# Altium PCB GPST.PcbDoc
Units mm, origin at the board's own origin, x right, y up, seen from the top; angles counter-clockwise.
Board outline 123 x 40 mm, 2 copper layers (Top Layer, Bottom Layer), stack 1.621 mm thick; 106 components, 112 nets, 419 pads, 213 vias.
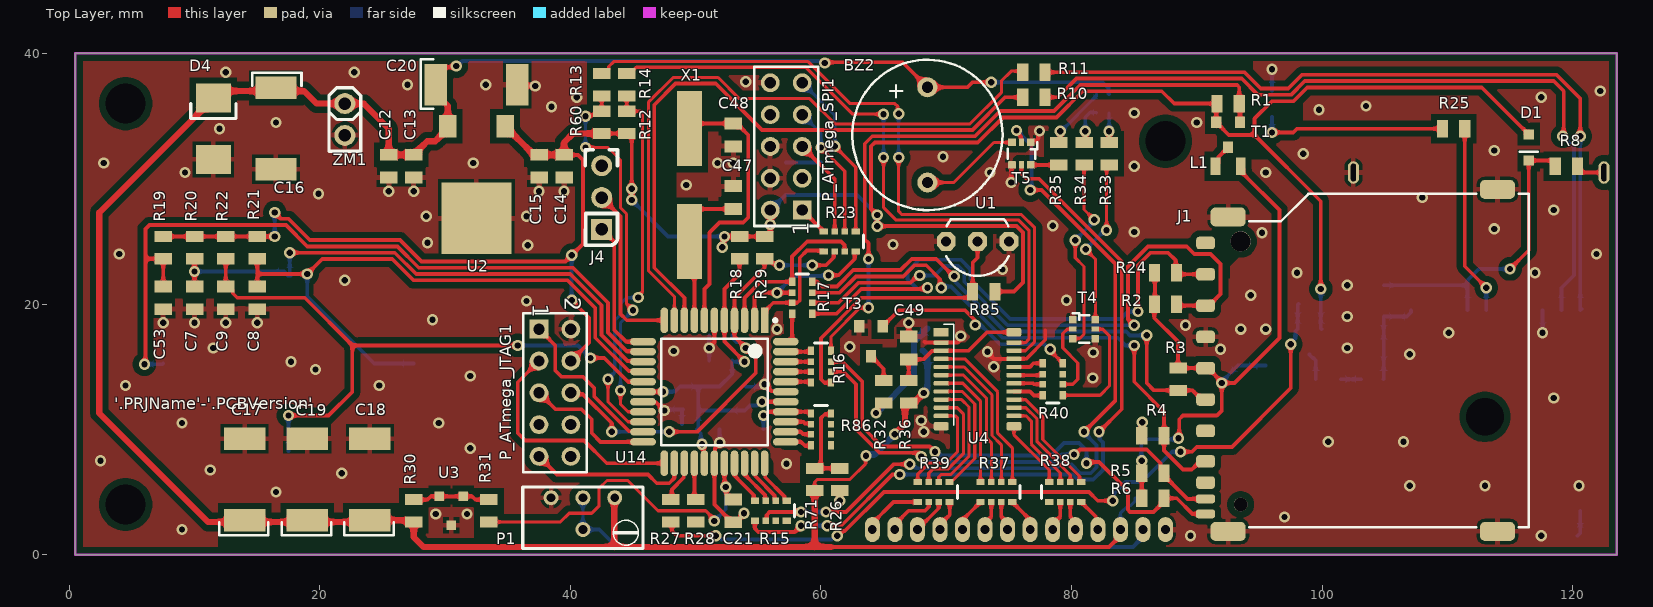
[diagram p0: Top Layer view]
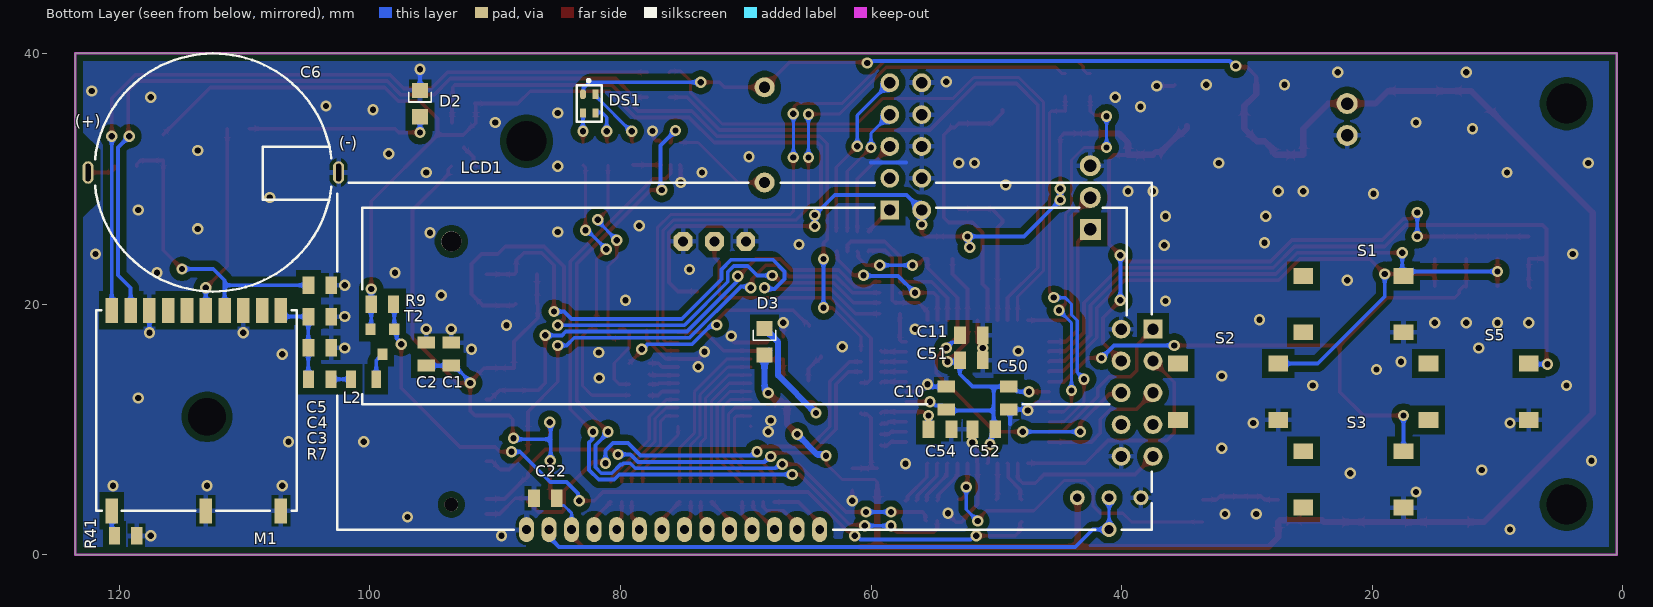
[diagram p1: Bottom Layer view, seen from below]

## Layer stack, top to bottom
Top Solder: solder mask 0.0102, Solder Resist, Dk 3.5
Top Layer: signal copper 0.0356
Dielectric1: core 1.55, FR-4, Dk 4.8
Bottom Layer: signal copper 0.0356
Bottom Solder: solder mask 0.0102, Solder Resist, Dk 3.5

## Board outline
0.5,0 0.5,40 123.5,40 123.5,0

## Design rules (kind name [scope] priority, off if disabled: settings)
AcuteAngle [All] p1 off: minimum=6.00000000000000E+0001 checktracksonly=FALSE
Clearance "Schematic Clearance Constraint" [InComponent('U14')] p1: gap=0.2 ignorepadtopadclearanceinfootprint=FALSE except(0: Arc-Hole Track-Hole SMDPad-Hole THPad-Hole Via-Hole Fill-Hole Poly-Hole Region-Hole Text-Hole)
Clearance "clearance polygon" [InPolygon] p2: gap=0.508 ignorepadtopadclearanceinfootprint=FALSE except(0: Arc-Hole Track-Hole SMDPad-Hole THPad-Hole Via-Hole Fill-Hole Poly-Hole Region-Hole Text-Hole)
Clearance [All] p3: gap=0.203 ignorepadtopadclearanceinfootprint=FALSE except(0: Arc-Hole Track-Hole SMDPad-Hole THPad-Hole Via-Hole Fill-Hole Poly-Hole Region-Hole Text-Hole)
ComponentClearance [All] p1: gap=0.001 collisioncheckmode=3 verticalgap=0.002 showdistances=TRUE
FanoutControl Fanout_Small [(CompPinCount < 5)] p4: bgadir=Out bgaviamode=Closest fanoutstyle=Rows fanoutdirection=OutOnly viagrid=0.025 // Fanout_Small (Default Rule)
FanoutControl Fanout_Default [All] p5: bgadir=Out bgaviamode=Centered fanoutstyle=Rows fanoutdirection=OutOnly viagrid=0.025 // Fanout_Default (Default Rule)
Height [All] p1 off: minheight=0 maxheight=50.4 prefheight=12.7
HoleSize [All] p1 off: absolutevalues=TRUE maxlimit=6 minlimit=0.3 maxpercent=80.000 minpercent=20.000
HoleToHoleClearance [All] p1 off: gap=0.254 allowstackedmicrovias=FALSE
LayerPairs [All] p1 off: enforce=TRUE
MinimumAnnularRing [All] p1 off: minimumring=0.2
MinimumSolderMaskSliver [All] p1 off: minsoldermaskwidth=0.152
NetAntennae [All] p1 off: netantennaetolerance=0
PasteMaskExpansion [All] p1: expansion=-0.025
PolygonConnect nothermals [isnamedpolygon('no_thermals')] p1: connectstyle=Direct reliefconductorwidth=0.254 reliefentries=4 polygonreliefangle="90 Angle" airgapwidth=0.254
PolygonConnect PolygonConnectVia [IsVia vs IsPolygon] p2: connectstyle=Direct reliefconductorwidth=0.762 reliefentries=4 polygonreliefangle="90 Angle" airgapwidth=0.254
PolygonConnect [All] p3: connectstyle=Relief reliefconductorwidth=0.406 reliefentries=4 polygonreliefangle="90 Angle" airgapwidth=0.254
RoomDefinition lcd [InComponentClass('lcd')] p1: confinementstyle=ConfineIn formatcopy=TRUE lockcomponents=FALSE outline 23.797,0.6 103.4,0.6 103.4,31.5 23.797,31.5
RoomDefinition up [InComponentClass('up')] p2: confinementstyle=ConfineIn formatcopy=TRUE lockcomponents=FALSE outline -2.3,0.4 89.2,0.4 89.2,39.2 -2.3,39.2
RoomDefinition sd [InComponentClass('sd')] p3: confinementstyle=ConfineIn formatcopy=TRUE lockcomponents=FALSE outline 86.1,0.8 118,0.8 118,30 86.1,30
RoomDefinition MAIN [InComponentClass('MAIN')] p4: confinementstyle=ConfineIn formatcopy=TRUE lockcomponents=FALSE outline 13.2,26.434 40.3,26.434 40.3,41.434 13.2,41.434
RoomDefinition gps [InComponentClass('gps')] p5: confinementstyle=ConfineIn formatcopy=TRUE lockcomponents=FALSE outline 97.7,-1.065 123.5,-1.065 123.5,25.435 97.7,25.435
RoutingVias [All] p1: holewidth=0.508 width=1.016 viastyle="Through Hole" minholewidth=0.406 minwidth=0.813 maxholewidth=0.711 maxwidth=1.27
SMDNeckDown [All] p1 off: percent=70.000
SMDToPlane [All] p1: distance=80000
SilkToSolderMaskClearance SilkscreenOverComponentPads [IsPad] p1 off: minsilkscreentomaskgap=0.152 clearancetoexposedcopper=TRUE
SolderMaskExpansion [All] p1: expansion=0.152 istentingtop=FALSE
Width Signal [All and not(InNetClass('Siec')) and not(InNetClass('HighCurrent'))] p1: maxlimit=5 minlimit=0.2 preferedwidth=0.3
Width POWER [All] p2: maxlimit=6 minlimit=0.3 preferedwidth=0.4
Width [All] p3: maxlimit=5 minlimit=0.2 preferedwidth=0.3
19 further rules are at their usual default settings.

## Classes and differential pairs
component class lcd: C22 C49 LCD1 P1 R36 R37 R38 R39 R40 U4
component class up: C7 C8 C9 C10 C11 C21 C47 C48 C50 C51 C52 C53 C54 P_ATmega_JTAG1 P_ATmega_SPI1 R12 R13 R14 R15 R16 R17 R18 R19 R20 R21 R22 R23 R26 R27 R28 R29 R30 R31 R60 R71 R85 R86 S1 S2 S3 S5 U3 U14 X1
component class sd: C1 C2 J1 L1 R1 R2 R3 R4 R5 R6 R24 T1
component class MAIN: BZ2 C12 C13 C14 C15 C16 C17 C18 C19 C20 D3 D4 DS1 J4 R32 R33 R34 R35 T3 T4 T5 U1 U2 ZM1
component class gps: C3 C4 C5 C6 D1 D2 L2 M1 R7 R8 R9 R10 R11 R25 R41 T2

## Components (designator, comment, footprint, x,y, rotation, side; value= is the part's Value field where it differs from the comment)
BZ2 "CFG06" CFG-06 68.5,33.5 r180 top
C1 "1u" C0805 93.5,16 r270 bottom
C2 "1u" C0805 95.5,16 r270 bottom
C3 "1u" C0805 104,16.5 r0 bottom
C4 "1u" C0805 104,19 r0 bottom
C5 "1u" C0805 104,21.5 r0 bottom
C6 "1F" EECRG0V105H 112.5,30.5 r0 bottom
C7 "10n" C0805 10,20.5 r270 top
C8 "10n" C0805 15,20.5 r270 top
C9 "10n" C0805 12.5,20.5 r270 top
C10 "1u" C0805 54,12.5 r270 bottom
C11 "10n" C0805 52,17.5 r0 bottom
C12 "1u" C0805 25.5,31 r90 top
C13 "1u" C0805 27.5,31 r90 top
C14 "1u" C0805 39.5,31 r90 top
C15 "1u" C0805 37.5,31 r90 top
C16 "330u" D 16.5,34 r270 top
C17 "330u" D 14,6 r90 top
C18 "330u" D 24,6 r90 top
C19 "330u" D 19,6 r90 top
C20 "330u" D 32.5,37.5 r0 top
C21 "100n" C0805 53,3.5 r90 top
C22 "1u" C0805 86,4.5 r0 bottom
C47 "10p" C0805 53,28.5 r270 top
C48 "10p" C0805 53,33.5 r90 top
C49 "1u" C0805 67,16.5 r270 top
C50 "1u" C0805 49,12.5 r90 bottom
C51 "1u" C0805 52,15.5 r0 bottom
C52 "1u" C0805 51,10 r180 bottom
C53 "10n" C0805 7.5,20.5 r270 top
C54 "100n" C0805 54.5,10 r180 bottom
D1 "RB751V-40" SOD323 116.5,32.5 r270 top
D2 "*" LED_0805 96,36 r90 bottom
D3 "*" LED_0805 68.5,17 r90 bottom
D4 "SM4007" MELF-MLL41 11.5,34 r90 top
DS1 "OSTB0603C1C" LED0603_4 82.5,36 r90 bottom
J1 "CARD-SD01G" CARD-SD01G 116.5,15.5 r90 top locked
J4 "SIL3M" SIL3M 42.5,28.5 r90 top
L1 "BLM21PG300SN1" L0805 92.5,31 r0 top
L2 "BLM21PG300SN1" L0805 100.5,14 r0 bottom
LCD1 "LCD-AC-C1602A-YGN" LCD-AC-C1602A-YGN 87.5,2 r180 bottom
M1 "FGPMMOPA6C" FGPMMOPA6C 113,11 r270 bottom
P1 "10k" POT67Y 41,2 r90 top
P_ATmega_JTAG1 "Header 5X2" HDR2X5 37.5,18 r270 top
P_ATmega_SPI1 "Header 5X2" HDR2X5 58.5,27.5 r90 top
R1 "100k" R0805 92.5,36 r180 top
R2 "47k" R0805 87.5,20 r0 top
R3 "47k" R0805 88.5,14 r270 top
R4 "47k" R0805 86.5,9.5 r0 top
R5 "47k" R0805 86.5,6.5 r0 top
R6 "47k" R0805 86.5,4.5 r0 top
R7 "10R" R0805 104,14 r180 bottom
R8 "100R" R0805 119.5,31 r180 top
R9 "100k" R0805 99,20 r0 bottom
R10 "100R" R0805 77,36.5 r180 top
R11 "100R" R0805 77,38.5 r180 top
R12 "3k3" R0805 44.5,34.5 r270 top
R13 "100R" R0805 42.5,37.5 r270 top
R14 "100R" R0805 44.5,37.5 r270 top
R15 "10k" YC164 56,3.5 r0 top
R16 "100R" YC164 60,15 r90 top
R17 "100R" YC164 58.5,20.5 r90 top
R18 "10R" R0805 53.5,24.5 r270 top
R19 "10k" R0805 7.5,24.5 r270 top
R20 "10k" R0805 10,24.5 r270 top
R21 "10k" R0805 15,24.5 r270 top
R22 "10k" R0805 12.5,24.5 r270 top
R23 "100R" YC164 61.5,25 r0 top
R24 "47k" R0805 87.5,22.5 r0 top
R25 "330R" R0805 110.5,34 r180 top
R26 "3k3" R0805 61.5,6 r270 top
R27 "100R" R0805 48,3.5 r90 top
R28 "100R" R0805 50,3.5 r90 top
R29 "3k3" R0805 55.5,24.5 r270 top
R30 "1k" R0805 27.5,3.5 r270 top
R31 "100R" R0805 33.5,3.5 r90 top
R32 "470R" R0805 65,13 r270 top
R33 "820R" R0805 83,32 r270 top
R34 "820R" R0805 81,32 r270 top
R35 "820R" R0805 79,32 r270 top
R36 "10R" R0805 67,13 r270 top
R37 "100R" YC164 74,5 r0 top
R38 "100R" YC164 79.5,5 r180 top
R39 "100R" YC164 69,5 r0 top
R40 "10k" YC164 78.5,14 r270 top
R41 "0R" R0805 119.5,1.5 r0 bottom
R60 "3k3" R0805 42.5,34.5 r270 top
R71 "3k3" R0805 59.5,6 r270 top
R85 "2k2" R0805 73,21 r0 top
R86 "100R" YC164 60,10 r90 top
S1 "DTSM-65K-V" DTSM-65K-V 21.5,20 r0 bottom
S2 "DTSM-65K-V" DTSM-65K-V 31.5,13 r0 bottom
S3 "DTSM-65K-V" DTSM-65K-V 21.5,6 r0 bottom
S5 "DTSM-65K-V" DTSM-65K-V 11.5,13 r0 bottom
T1 "IRLML6402" MICRO3 92.5,33.5 r180 top
T2 "IRLML6402" MICRO3 99,17 r0 bottom
T3 "SMBT3904" SOT23J 64,17 r180 top
T4 "BC847BS" SOT363 81,18 r0 top
T5 "BC847BS" SOT363 76,32 r270 top
U1 "DS18B20" TO-92 72.5,25 r180 top
U2 "LP38690DT-3.3" DPAK 32.5,29.5 r180 top
U3 "KA431SAMF" SOT23-3 30.5,3.5 r180 top
U4 "TCA9539PWR" PW_R-PDSO-G24 72.5,14 r270 top
U14 "ATmega644PA-AU" 44A_M 51.5,13 r270 top
X1 "8M" HC-49SM 49.5,29.5 r270 top
ZM1 "SIL2M" SIL2M 22,36 r270 top

## Footprints (in the part's own frame and the unit in brackets; to place one, negate y for a bottom-side part, rotate by r counter-clockwise, add the part's x,y. Pads: shape width x height; smd on the part's side, far side on the other; paste and mask are expansions set on the pad)
44A_M [mm] "Thin QFP, 44-Leads, Body 10x10mm, Pitch 0.8mm, IPC Low Density"
  rect 2.05x0.6 smd: 1(-5.7,4)
  oval 2.05x0.6 smd: 2(-5.7,3.2) 3(-5.7,2.4) 4(-5.7,1.6) 5(-5.7,0.8) 6(-5.7,0) 7(-5.7,-0.8) 8(-5.7,-1.6) 9(-5.7,-2.4) 10(-5.7,-3.2) 11(-5.7,-4) 23(5.7,-4) 24(5.7,-3.2) 25(5.7,-2.4) 26(5.7,-1.6) 27(5.7,-0.8) 28(5.7,0) 29(5.7,0.8) 30(5.7,1.6) 31(5.7,2.4) 32(5.7,3.2) 33(5.7,4)
  oval 0.6x2.05 smd: 12(-4,-5.7) 13(-3.2,-5.7) 14(-2.4,-5.7) 15(-1.6,-5.7) 16(-0.8,-5.7) 17(0,-5.7) 18(0.8,-5.7) 19(1.6,-5.7) 20(2.4,-5.7) 21(3.2,-5.7) 22(4,-5.7) 34(4,5.7) 35(3.2,5.7) 36(2.4,5.7) 37(1.6,5.7) 38(0.8,5.7) 39(0,5.7) 40(-0.8,5.7) 41(-1.6,5.7) 42(-2.4,5.7) 43(-3.2,5.7) 44(-4,5.7)
  silkscreen extent -5.82,-4.25 4.25,4.98, body extent -5,-5 5,5, height 1.2
C0805 [mil]
  rect 37.5x55 smd: 1(-36,0) 2(36,0)
  body extent -39,-26 39,24, height 31
CARD-SD01G [mm]
  rrect50% 1.5x2.8 smd: 0(-13.65,24) 0(-13.65,2.5) 0(11.45,24) 0(13.65,2.5)
  rrect50% 1x1.5 smd: 1(6.875,25.8) 2(4.375,25.8) 3(1.875,25.8) 4(-0.625,25.8) 5(-3.125,25.8) 6(-5.625,25.8) 7(-8.05,25.8) 8(-9.75,25.8) 9(9.375,25.8)
  rrect50% 0.7x1.5 smd: 10(-11.05,25.8) 11(-12.25,25.8)
  round 1.1 hole 1.1 unplated: MH(-11.5,23)
  round 1.6 hole 1.6 unplated: MH(9.5,23)
  silkscreen extent -13.3,0 13.3,22.3, body extent -13.65,-11.2 13.75,26.34, height 3.01
CFG-06 [mm] "beeper"
  round 1.6 hole 0.9: +(0,-3.8) -(0,3.8)
  silkscreen extent -6,-6 6,6
D [mil] "tantalum capacitor"
  rect 71x130 smd: +(-128,0) -(128,0)
  silkscreen extent -175,-75 -135,80, body extent -144,-84 144,85, height 111
DPAK [mil]
  rect 55x70 smd: 1(-90,-185) 3(90,-185)
  rect 80x80 on Top Paste: 3(60,160) 4(60,60) 5(-60,60) 6(-60,160)
  rect 220x225 smd paste-220: 4(0,105)
  body extent -129,-191 130,191, height 91
DTSM-65K-V [mm] "6.2 x 6.2"
  rect 1.575x1.27 smd: 1(-4,-2.25) 2(-4,2.25) 3(4,-2.25) 4(4,2.25)
  body extent -4.5,-3.1 4.5,3.1, height 9.7
EECRG0V105H [mm]
  oval 0.9x1.8 hole 0.4 slot 1.4 at 90 deg: +(10,0) -(-10,0)
  silkscreen extent -9.43,-9.5 9.44,9.5
FGPMMOPA6C [mm] "moduł gps"
  rect 2x1 smd: 1(-8.5,5.9) 2(-8.5,4.4) 3(-8.5,2.9) 4(-8.5,1.4) 5(-8.5,-0.1) 6(-8.5,-1.6) 7(-8.5,-3.1) 8(-8.5,-4.6) 9(-8.5,-6.1) 10(-8.5,-7.6) 11(7.5,-7.6) 12(7.5,-0.1) 13(7.5,5.9)
  round 0 hole 3 unplated: H(0,0)
  silkscreen extent -8.5,-8.85 7.5,7.15
HC-49SM [mm]
  rect 6x2 smd: 1(-4.5,0) 2(4.5,0)
  body extent -5.7,-2.35 5.7,2.35, height 5
HDR2X5 [mm] "Connector; Header; 5x2 Position"
  rect 1.5x1.5 hole 0.9: 1(0,0)
  round 1.5 hole 0.9: 2(0,2.54) 3(2.54,0) 4(2.54,2.54) 5(5.08,0) 6(5.08,2.54) 7(7.62,0) 8(7.62,2.54) 9(10.16,0) 10(10.16,2.54)
  silkscreen extent -1.27,-1.27 11.43,3.81
L0805 [mil] "chip inductor"
  rect 31x55 smd: 1(-39.5,0) 2(39.5,0)
  body extent -40,-25 40,25, height 40
LCD-AC-C1602A-YGN [mm]
  oval 1.2x2 hole 0.7: 1(0,0) 2(1.8,0) 3(3.6,0) 4(5.4,0) 5(7.2,0) 6(9,0) 7(10.8,0) 8(12.6,0) 9(14.4,0) 10(16.2,0) 11(18,0) 12(19.8,0) 13(21.6,0) 14(23.4,0)
  silkscreen extent -15.1,0 49.9,27.7
LED0603_4 [mm] "0603; RGB; 1,6x0,8mm;"
  oct 0.75x0.5 smd: 1(0.75,0.5)
  rect 0.75x0.5 smd: 2(0.75,-0.5) 3(-0.75,0.5) 4(-0.75,-0.5)
  silkscreen extent -1.46,-1 1.93,1, body extent -1.23,-0.85 1.23,0.85, height 0.5
LED_0805 [mm] "LED SMD 0805"
  rect 1.2x1.25 smd: A(-1.05,0) K(1.05,0)
  silkscreen extent 0.13,-0.89 0.89,0.89, body extent -1,-0.6 1,0.65, height 0.78
MELF-MLL41 [mm] "metal electrode face (MELF)"
  rect 2.3x2.794 smd: A(-2.455,0) K(2.455,0)
  silkscreen extent 0.8,-1.8 2,1.8, body extent -2.5,-1.27 2.5,1.23, height 2.5
MICRO3 [mil]
  rect 32x36 smd: D(0,39.37) G(-37.4,-39.37) S(37.4,-39.37)
  body extent -57,-48 57,47, height 39
POT67Y [mm] "potencjometr pionowy"
  round 1.2 hole 0.7: 1(2.54,-2.54) 2(0,0) 2(2.54,0) 3(2.54,2.54)
  silkscreen extent -1.5,-4.8 3.4,4.8, body extent -1.55,-4.85 3.45,4.85, height 11.1
PW_R-PDSO-G24 [mm] "TSSOP, wg TI jest to PW"
  rect 0.7x1.2 smd: 1(-3.75,-2.9)
  rrect50% 0.35x1.2 smd: 2(-2.925,-2.9) 3(-2.275,-2.9) 4(-1.625,-2.9) 5(-0.975,-2.9) 6(-0.325,-2.9) 7(0.325,-2.9) 8(0.975,-2.9) 9(1.625,-2.9) 10(2.275,-2.9) 11(2.925,-2.9) 14(2.925,2.9) 15(2.275,2.9) 16(1.625,2.9) 17(0.975,2.9) 18(0.325,2.9) 19(-0.325,2.9) 20(-0.975,2.9) 21(-1.625,2.9) 22(-2.275,2.9) 23(-2.925,2.9)
  rrect50% 0.7x1.2 smd: 12(3.75,-2.9) 13(3.75,2.9) 24(-3.75,2.9)
  silkscreen extent -4.4,-2.7 3.67,-1.9, body extent -3.95,-2.2 3.95,2.2, height 1.2
R0805 [mil]
  rect 35x55 smd: 1(-35,0) 2(35,0)
  body extent -39,-24 39,26, height 31
SIL2M [mil] "proste"
  round 66 hole 39.37: 1(0,0) 2(100,0)
  silkscreen extent -50,-50 150,50, body extent -49,-50 149,48, height 351
SIL3M [mil]
  rect 66x66 hole 39.37: 1(-100,0)
  round 66 hole 39.37: 2(0,0) 3(100,0)
  silkscreen extent -150,-50 150,51, body extent -150,-50 150,50, height 339
SOD323 [mil]
  rect 32x32 smd: A(-41,0) K(41,0)
  silkscreen extent 14,-29 14,28, body extent -52,-27 50,26, height 44
SOT23-3 [mm] "SOT-23 wersja polecana przez National"
  rect 0.76x0.76 smd: 1(-0.953,-1.15) 2(0.953,-1.15) 3(0,1.15)
  body extent -1.45,-1.22 1.45,1.2, height 1
SOT23J [mil] "SOT-23"
  rect 32x40 smd: 1(37,-48) 2(-37,-48) 3(0,46)
  body extent -57,-48 57,47, height 39
SOT363 [mm]
  rrect2% 0.6x0.6 smd: 1(-0.9,0.75) 3(-0.9,-0.75) 4(0.9,-0.75) 6(0.9,0.75)
  rrect2% 0.6x0.4 smd: 2(-0.9,0) 5(0.9,0)
  silkscreen extent -0.9,-1.1 0.4,1.28, body extent -1.12,-1.07 1.12,1.08, height 1.1
TO-92 [mm]
  oct 1.5x1.5 hole 0.8: 1(-2.5,0) 2(0,0) 3(2.5,0)
  silkscreen extent -2.47,-1.75 2.49,2.75
YC164 [mm] "Resistor Array 0804 Size"
  rect 0.65x0.5 smd: 1(-1.275,-0.8) 4(1.275,-0.8) 5(1.275,0.8) 8(-1.275,0.8)
  rect 0.5x0.5 smd: 2(-0.4,-0.8) 3(0.4,-0.8) 6(0.4,0.8) 7(-0.4,0.8)
  silkscreen extent 1.9,-0.5 1.9,0.5, body extent -1.6,-0.8 1.6,0.8, height 0.55

## Part data
BZ2: "BUZZER;", Indeks=MAKB002, P&P=0
C1 C2 C3 C4 C5: library part C, "C; capacitor"
C6 C16 C17 C18 C19 C20: library part C_pol, "C; Polarized Capacitor"
  C6: Indeks=MKOT0005213, P&P=0
C7 C8 C9 C10 C11 C12 C13 C14 C15 C21 C22 C47 C48 C49 C50 C51 C52 C53 C54: library part c, "C; capacitor", P&P=1
  C7 C8 C9 C11 C53: Indeks=MKOS0603057
  C10 C12 C13 C14 C15 C22 C49 C50 C51 C52: Indeks=MKOS0603021
  C21 C54: Indeks=MKOS0603002
  C47 C48: Indeks=MKOS0603039
D1: "DS; Schottky Rectifier", Indeks=MDISS002, P&P=1
D2 D3: library part LED, "LED;"
D4: "D;", Indeks=MDISP001, P&P=1
DS1: library part "OPTOSUPPLY OSTB0603C1C", "LED, RGB, SMD", Indeks=MOPSL068, Obudowa=LED0603, P&P=1
J1: library part SD, "SD Card Socket, push-pull", ID=631, Order Code=CARD-SD01G-LF, Part No=CARD-SD01G, Supplier=Maritex
J4: "CON; prosty meski", Indeks=MZLMP008
L1 L2: "L;", Indeks=MIDSD062, P&P=1
M1: "GPS", Indeks=MUKSC480, P&P=1
P1: library part POT67Y, "R_P", P&P=0
P_ATmega_JTAG1 P_ATmega_SPI1: "Header, 5-Pin, Dual row", Indeks=MZLMP002, LatestRevisionDate=17-Jul-2002, LatestRevisionNote="Re-released for DXP Platform.", P&P=0, Publisher="Altium Limited"
R1 R2 R3 R4 R5 R6 R7 R8 R9 R10 R11 R12 R13 R14 R18 R19 R20 R21 R22 R24 R25 R26 R27 R28 R29 R30 R31 R32 R33 R34 R35 R36 R41 R60 R71 R85: library part R, "R; resistor"
  R12 R13 R14 R18 R26 R27 R28 R29 R36 R60 R71: Indeks=MRESR0603091, P&P=1
  R85: Indeks=MRESR0603112, P&P=1
R15 R16 R17 R23 R37 R38 R39 R40 R86: library part YC164, "R; Drabinka rezystorowa", Indeks=MRESD4D03003, P&P=1
S1 S2 S3 S5: "SWITCH; TACT switch, 6x6, h=9.5mm", Indeks=MPLSM008, P&P=1
T1 T2: "T_M_P; P-Channel MOSFET", Indeks=MTRSP030, P&P=1
T3 T4 T5: "T_NPN; Bipolar Transistor", P&P=1
  T3: Indeks=MTRSB002
  T4 T5: Indeks=MTRSB057
U1: "temperature sensor", Indeks=MUKTC049, P&P=0
U2: "LDO; 1A Low Dropout CMOS Linear Regulators", DigiKeyPartNumber=LP38690DT-3.3-ND, Manufacturer="National Semiconductor", PackageOrig=DPAK, PackageTopMarking=NSUZXYTT*LP38690*DT-3.3, PowerWise=Y, Code_JEDEC=TO-252-AA, ComponentLink1Description="LP38690 Datasheet", ComponentLink1URL=http://www.national.com/ds/LP/LP38690.pdf, ComponentLink2Description="LP38690 Web Page", ComponentLink2URL=http://www.national.com/pf/LP/LP38690.html, ComponentLink3Description="TD03B Package Page", ComponentLink3URL=http://www.national.com/packaging/folders/td03b.html, CompType="LDO IC", DatasheetVersion=May-2005, Indeks=MUKSA135, P&P=1, PackageDescription="TO252, Molded, Jedec, 6.8 x 6.10 x 2.30mm Body, 3 Lead, 2.28mm Pitch, Surface Mount", PackageReference=TD03B, PackageVersion="revC, Apr-2003", PartNumber=LP38690DT-3.3, PinCount=3, Published=4-Dec-2008, Publisher="Altium Limited", RoHS=Y
U3: "REF; SOT23; Fairchild", Indeks=MUKSM038, Obudowa=SOT23, P&P=1
U4: "I2C 16-BIT port", Indeks=MUKSC382, P&P=1
U14: library part ATmega644PA, Indeks=MUKSC1065, P&P=1, PackageDescription="44-Pin Plastic Thin Profile Quad Flat Pack, 10 x 10 x 1.0 mm Body, 0.8 mm Pitch (TQFP)", PackageReference=44A, Rule="Clearance Constraint [Clearance = 0.2mm]"
X1: library part XTAL, "OSC_Q; Crystal Oscillator", Indeks=MRZS*, P&P=0
ZM1: "CON; prosty, pojedynczy, meski", P&P=0
LCD1: P&P=0

## Free pads (board coordinates)
  round 0 hole 3.2 unplated: 2(4.5,4) 2(4.5,36) 2(87.5,33)

## Via types
v1: diameter 0.9, hole 0.5, Top Layer to Bottom Layer, tented both sides, 213 vias

## Nets (pads, with @x,y where several pads share a name; then routed paths per layer and width w, separated by ;. In a path a pad name is that pad's centre, name@x,y a point inside that pad or via, vN(x,y) a via of type N, cw(c..) or ccw(c..) an arc to the next point about the centre after c; other vN are vias at no path point)
+3.3: C14.2 C15.2 D1.A P_ATmega_JTAG1.4 P_ATmega_SPI1.2 R1.2 R9.2 R12.2 R18.1 R19.1 R20.1 R21.1 R22.1 R29.1 R60.2 R85.2 T1.S T2.S U2.1 | length 205.3
  Top Layer w0.3: R19.1 R20.1 R22.1 R21.1 15.005,25.395 16.395,25.395 v1(16.4,25.4) ; v1(16.4,27.3) 16.897,26.803 17.508,26.803 19.205,25.106 26.405,25.106 28.108,23.403 39.603,23.403 v1(40.1,23.9) 41,24.8 41,31.5 40.6,31.9 39.514,31.9 C14.2 ; P_ATmega_JTAG1.4 41.484,16.904 41.484,18.9 40.1,20.284 v1(40.1,20.3) ; R60.2@42.495,33.606 R60.2 R12.2 44.606,33.611 44.9,33.317 v1(44.9,28.3) ; v1(52.129,24.533) 52.215,24.618 52.215,25.315 v1(52.3,25.4) 52.306,25.395 53.495,25.395 R18.1 R29.1 55.666,25.389 55.96,25.684 v1(55.96,26.35) ; v1@55.96,26.5 v1(55.96,26.35) ; P_ATmega_SPI1.2 v1(55.96,26.35) ; R85.2 75.4,21 76.122,21.722 76.122,25.702 75.602,26.222 64.5,26.222 64.5,26.477 v1(64.5,27.1) 64.003,27.596 64.003,32.592 64.305,32.894 72.517,32.894 74.52,34.897 78.808,34.897 80.902,36.99 87.204,36.99 88.194,36 R1.2 91.55,35.939 T1.S 91.55,34.449 91.806,34.193 91.857,34.193 92.55,33.5 94.6,33.5 ; v1(99.9,21.2) 99.9,28.2 94.6,33.5 ; D1.A 112.748,37.294 98.817,37.294 97.717,36.194 95.994,36.194 94.6,34.8 94.6,33.5
  Top Layer w0.5: U2.1 34.786,34.009 35.234,33.56 35.425,33.56 36.844,32.141 37.274,32.141 C15.2 C14.2 39.5,32.9 40.211,33.611 R60.2
  Bottom Layer w0.3: v1(16.4,25.4) v1(16.4,27.3) ; v1(40.1,20.3) v1(40.1,23.9) ; v1(44.9,29.2) v1(44.9,28.3) 47.8,25.4 v1(52.3,25.4) 52.215,25.315 52.215,24.618 v1(52.129,24.533) ; v1(55.96,26.35) P_ATmega_SPI1.2 57.16,28.7 62.899,28.7 v1(64.5,27.1) v1(64.5,26.2) ; v1(99.9,21.2) 99.9,18.05 T2.S
+5: BZ2.+ C12.2 C13.2 C16.+ C17.+ C18.+ C19.+ C20.+ C22.1 D3.A D4.K DS1.1 LCD1.3 P1.1 R30.2 R36.2 R71.2 U2.3@30.214,34.199 ZM1.1 | length 229.3
  Top Layer w0.25: R71.2 59.5,5.8 59.7,6 62.3,6 63.567,7.267 63.567,7.867 v1(63.6,7.9)
  Top Layer w0.3: C20.+ 29.249,38.162 30.001,38.914 30.814,38.914 v1(30.9,39) ; v1(60.3,39.247) 60.353,39.3 66.5,39.3 BZ2.+ 71.7,37.3 72.1,37.7 v1(73.6,37.7) ; 60.8,0.6 83,0.6 83.9,1.5 LCD1.3
  Top Layer w0.5: C20.+ 29.249,36.751 29.901,36.099 29.921,36.099 30.214,35.806 30.214,34.199 30.214,34.009 29.205,33 28.586,33 27.948,32.363 27.948,32.141 27.722,31.914 C13.2 C12.2 25.5,34 23.5,36 ZM1.1 19.75,36 18.749,37.001 12.101,37.001 2.4,27.3 2.4,11.3 11.1,2.6 23.851,2.6 C18.+ 27.362,2.749 R30.2 27.5,1.4 28.3,0.6 43.5,0.6 ; P1.1 43.5,4.5 43.5,0.6 ; R71.2 59.5,0.6 ; 60.8,0.6 59.5,0.6 ; v1(65.9,9.6) 66.7,10.4 66.7,12.111 R36.2 67.195,12.306 67.606,12.306 v1(68.2,12.9) ; 43.5,0.6 59.5,0.6
  Bottom Layer w0.25: LCD1.3 83.9,3.314 84.512,3.927 84.734,3.927 85.086,4.278 C22.1
  Bottom Layer w0.3: v1(30.9,39) 30.976,39 31.376,39.4 59.824,39.4 59.863,39.362 60.185,39.362 v1(60.3,39.247) ; v1(73.6,37.7) 82.5,37.7 82.957,37.243 82.957,36.793 DS1.1
  Bottom Layer w0.5: v1(63.6,7.9) 63.677,7.977 63.958,7.977 63.969,7.988 64.288,7.988 v1(65.9,9.6) ; D3.A@68.125,16.3 68.475,15.95 D3.A 68.5,13.2 v1(68.2,12.9)
BUZZER: R15.1 T5.5 | length 60
  Top Layer w0.3: R15.1 54.725,2.075 55,1.8 57.9,1.8 58.397,2.297 v1(58.4,2.297) ; v1(60.5,2.3) 60.586,2.386 61.698,2.386 65.712,6.4 v1(66.3,6.4) ; T5.5 76,30.4 76.4,30 77.412,30 84.003,23.408 84.003,11.603 v1(82.2,9.8)
  Bottom Layer w0.3: v1(58.4,2.297) 60.497,2.297 v1(60.5,2.3) ; v1(66.3,6.4) 66.306,6.394 80.095,6.394 80.492,5.997 81.741,5.997 82.506,6.762 82.506,8.941 82.26,9.187 82.26,9.74 v1(82.2,9.8)
D0: LCD1.7 R37.4 | length 2.8
  Top Layer w0.3: R37.4 75.35,4.2 75.45,4.1 75.45,4.025 76.528,2.947 76.528,2.172 LCD1.7
D1: LCD1.8 R37.3 | length 2.4
  Top Layer w0.3: R37.3 74.4,3.026 74.9,2.526 LCD1.8
D2: LCD1.9 R37.2 | length 2.4
  Top Layer w0.3: LCD1.9 73.1,2.526 73.6,3.026 R37.2
D3: LCD1.10 R37.1 | length 2.8
  Top Layer w0.3: LCD1.10 71.472,2.172 71.472,2.947 72.55,4.025 72.55,4.1 72.65,4.2 R37.1
D4: LCD1.11 R39.4 | length 2.5
  Top Layer w0.3: LCD1.11 69.5,2.4 70.275,3.175 R39.4
D5: LCD1.12 R39.3 | length 3.5
  Top Layer w0.3: LCD1.12@67.7,2.644 LCD1.12 69.4,3.7 R39.3
D6: LCD1.13 R39.2 | length 4.1
  Top Layer w0.3: LCD1.13 65.9,2.4 67,3.5 68.3,3.5 68.6,3.8 R39.2
D7: LCD1.14 R39.1 | length 4.8
  Top Layer w0.3: LCD1.14 64.1,2.5 65.8,4.2 R39.1
E: LCD1.6 R38.6 | length 2.4
  Top Layer w0.3: LCD1.6 78.5,2.426 79.1,3.026 R38.6
GND: C1.1 C2.1 C3.1 C4.1 C5.1 C6.- C7.2 C8.2 C9.2 C10.1 C11.1 C12.1 C13.1 C14.1 C15.1 C16.- C17.- C18.- C19.- C20.- C21.1 C22.2 C47.1 C48.1 C49.1 C50.1 C51.1 C52.1 C53.2 C54.2 D2.K D4.A J1.0 J1.3 J4.3 LCD1.1 M1.3 M1.8 M1.12 M1.13 P1.3 P_ATmega_JTAG1.2 P_ATmega_JTAG1.10 P_ATmega_SPI1.4 P_ATmega_SPI1.6 P_ATmega_SPI1.8 P_ATmega_SPI1.10 R26.2 R41.1 S1.2 S2.2 S3.2 S5.2 T3.1 T4.1 T4.4 T5.1 T5.4 U1.1 U1.3 U2.4@32.5,26.833 U3.3 U4.2 U4.12 U4.21 U14.6 U14.18 U14.28 U14.39 ZM1.2 | length 44.1
  Top Layer w0.3: C20.- 35.851,37.4 v1(37.2,37.4) ; U14.18 45.857,12.143 46.857,12.143 v1(47.5,11.5) ; v1(51.086,16.5) 51.086,16.561 51.5,16.976 U14.6 ; v1(51.913,8.947) 51.913,8.845 51.54,8.472 51.54,7.34 U14.28 51.5,4.002 52.452,3.05 52.452,2.912 52.778,2.586 53.222,2.586 53.85,3.214 v1(53.85,3.303) ; v1@55.518,13.582 56.057,13.043 57.157,13.043 U14.39 ; v1(61.5,4.3) R26.2 ; C49.1 v1(67,18.5) ; 68.25,17 68.325,16.925 U4.2 70.925,16.925 v1@71.25,17.25 ; v1(73.3,16.2) 73.3,16.112 73.792,15.62 75.395,15.62 U4.21 76.38,15.625 77.9,17.145 77.9,17.9 ; v1(75.2,29.7) 75.2,31.05 T5.4 ; T5.1 76.9,33.05 77.177,33.05 77.353,33.226 77.353,33.723 v1(77.441,33.811)
  Bottom Layer w0.3: v1(47.5,11.5) 47.586,11.586 C50.1 48.9,11.486 48.9,10.4 ; C51.1 v1(51.086,16.5) C11.1 ; v1(51.913,8.947) C52.1 C52.1 ; C10.1 54.014,13.4 55.138,13.4 55.338,13.6 v1(55.5,13.6) ; 57.2,31.3 60,31.3 ; D2.K v1(96,38.75) ; v1(117.6,17.7) M1.8
  other v1: 89.5,1.5 117.5,1.5 9,2 97,3 29.25,3.25 31.75,3.25 16.5,5 107,5.5 113,5.5 120.5,5.5 21.75,6.5 11.25,6.75 57.25,7.25 2.5,7.5 32,8.5 100.5,9 106.5,9 68.2,9.8 9,10.5 29.5,10.5 68,10.7 118.5,12.5 4.5,13.5 24.75,13.5 81.7,14.1 32,14.25 19.65,14.775 73.8,15 17.7,15.4 107,16 81.731,16.128 48.25,16.25 91.9,16.4 11.5,16.5 102,16.5 62.3,16.6 71.16,17.459 110.1,17.7 56.5,18 93.5,18 95.5,18 89.1,18.3 7.5,18.5 10,18.5 12.5,18.5 15,18.5 29,18.75 102,19 36.5,20.25 79.6,20.3 94.3,20.7 102,21.5 22,21.9 98,22.5 117,22.5 74.5,22.75 4,24 121.9,24 36.6,24.7 65.75,24.75 28.6,24.9 95.2,25.7 85,25.75 113.75,26 78.5,26.25 28.5,27 36.5,27 118.5,27.5 108,28.5 19.9,28.8 25.5,29 27.5,29 37.5,29 39.5,29 49.25,29.5 9.25,30.5 73.5,30.5 95.5,30.5 85,31 2.75,31.25 32.25,31.25 51.75,31.25 53,31.25 69.75,31.75 98.5,32 113.75,32.25 12,34 16.5,34.5 90,34.5 85,35.25 99.75,35.5 38.5,35.75 103.5,35.8 40.5,36.5 117.5,36.5 122.2,37 27,37.5 33.25,37.5 54,37.75 12.5,38.5 22.75,38.5
LED_B: R40.6 T4.2 | length 6.5
  Top Layer w0.25: R40.6 80.1,13.6 80.5,14 80.5,15.3 79.3,16.5 79.3,17.65 79.65,18 T4.2
LED_G: R40.5 T4.5 | length 9.4
  Top Layer w0.25: R40.5 82.285,12.725 83.022,13.462 83.022,17.478 82.5,18 T4.5
LED_R: R15.2 T5.2 | length 62.7
  Top Layer w0.3: R15.2 55.668,2.768 55.668,3.168 55.9,3.4 v1(58.4,3.4) ; v1(60.403,3.4) 62,3.4 65.822,7.222 v1(67.083,7.222) ; v1(75.605,33.85) 75.605,33.72 75.95,33.375 75.95,32.95 T5.2 ; v1(76.7,29.1) 77.6,29.1 83.5,23.2 83.5,12.3 v1(81,9.8)
  Bottom Layer w0.3: v1(58.4,3.4) v1(60.403,3.4) ; v1(67.083,7.222) 67.122,7.222 67.2,7.3 67.603,6.897 68.292,6.897 78.82,6.897 79.223,7.3 79.764,7.3 79.867,7.197 80.003,7.197 80.7,6.5 81.533,6.5 82.003,6.971 82.003,7.636 82,7.639 82,8.736 81,9.736 v1(81,9.8) ; v1(75.605,33.85) 76.8,32.655 76.8,29.2 v1(76.7,29.1)
LED_W: R40.8 T3.2 | length 17
  Top Layer w0.3: T3.2 64.94,18.321 65.196,18.577 65.298,18.577 66.221,19.5 71.5,19.5 72.211,18.789 72.211,18.441 v1(72.326,18.326) ; v1@78.3,16.238 v1@78.3,16.275 ; v1(78.3,16.4) v1@78.3,16.275 ; R40.8 v1@78.3,16.275
  Bottom Layer w0.3: v1(72.326,18.326) 72.75,18.326 74.276,16.801 77.824,16.801 78.225,16.4 v1(78.3,16.4)
MISO: R17.6 R23.4 U14.2 | length 13
  Top Layer w0.3: U14.2 54.7,20.577 55.023,20.9 R17.6 ; v1(60.6,22.3) 61.4,22.3 62.7,23.6 62.7,24.2 R23.4
  Bottom Layer w0.3: v1(56.5,20.903) 56.503,20.903 57.841,22.241 60.6,22.241 v1(60.6,22.3)
MOSI: R17.7 R23.1 U14.1 | length 9.5
  Top Layer w0.3: U14.1 55.5,19.425 55.65,19.575 55.675,19.575 56.2,20.1 R17.7 58.113,20.1 58.303,20.29 58.303,23.692 58.88,24.268 60.157,24.268 R23.1
NetBZ2_-: BZ2.- T5.3 | length 8.1
  Top Layer w0.25: BZ2.- 70.6,29.7 73.8,32.9 T5.3
NetC1_2: C1.2 C2.2 J1.4 L1.2 R2.1 R3.1 R4.1 R5.1 R6.1 R24.1 | length 55.1
  Top Layer w0.3: v1(85.6,7.5) 85.606,7.495 85.606,6.506 R5.1 R6.1 ; R4.1 85.624,9.513 85.624,10.55 v1(85.637,10.563) ; R24.1@86.658,22.364 86.658,20.047 R2.1 86.611,18.889 88.5,17 R3.1 90.686,14.889 J1.4 90.896,14.875 92,13.771 v1(92,13.7) ; v1(88.543,9.295) 88.6,9.352 88.6,10.8 88.9,11.1 91.6,11.1 92,11.5 v1(92,13.7) ; L1.2 93.747,30.756 93.747,30.352 96.6,27.499 96.6,17.3 93,13.7 v1(92,13.7)
  Bottom Layer w0.3: v1(85.6,7.5) 85.563,7.537 85.563,9.2 ; v1(85.637,10.563) 85.563,10.489 85.563,9.2 ; v1(88.543,9.295) 88.448,9.2 85.563,9.2 ; v1(92,13.7) 92,13.8 92.952,14.752 92.952,14.759 93.278,15.086 C1.2 C2.2
NetC3_2: C3.2 C4.2 M1.1 R7.1 | length 7.5
  Bottom Layer w0.3: R7.1 104.914,14.025 C3.2 C4.2 106.75,19 107.1,19.35 M1.1
NetC5_2: C5.2 D1.K M1.4 R8.2 | length 24.5
  Top Layer w0.3: v1(115,22.8) 116.5,24.3 D1.K 118.317,31.459 118.611,31.164 R8.2
  Bottom Layer w0.3: C5.2 111.6,21.5 ; M1.4 111.6,21.5 ; v1(115,22.8) 112.5,22.8 111.6,21.9 111.6,21.5
NetC6_+: C6.+ R8.1 | length 2.4
  Top Layer w0.3: R8.1 120.389,30.795 120.684,30.5 C6.+
NetC7_1: C7.1 R20.2 S1.1 U14.14 | length 45.1
  Top Layer w0.3: C7.1 v1(10,22.6) R20.2 ; v1(17.6,24.1) 25.988,24.1 27.692,22.397 39.992,22.397 42.49,19.898 42.49,17.521 44.554,15.457 45.743,15.457 U14.14
  Bottom Layer w0.3: v1(10,22.6) 17.15,22.6 S1.1 17.652,22.25 17.6,22.302 v1(17.6,24.1)
NetC8_1: C8.1 R21.2 S2.1 U14.15 | length 51.1
  Top Layer w0.3: C8.1 15,22.4 ; R21.2 15,22.4 ; U14.15 45.753,14.647 44.653,14.647 41.987,17.313 41.987,19.69 39.783,21.894 27.483,21.894 25.78,23.597 20.197,23.597 v1(19,22.4) 15,22.4
  Bottom Layer w0.3: v1(19,22.4) 19,20.6 24.35,15.25 S2.1
NetC9_1: C9.1 R22.2 S3.1 U14.16 | length 51.2
  Top Layer w0.3: R22.2 C9.1 ; C9.1@12.514,21.4 C9.1 ; v1(17.5,11.1) 20.7,11.1 22.6,13 22.6,16.7 ; v1(35.8,16.7) 22.6,16.7 ; v1(41.6,15.7) 42.7,15.7 44.6,13.8 U14.16 ; C9.1 12.722,21.414 13.049,21.088 13.049,20.866 13.414,20.5 18.8,20.5 22.6,16.7
  Bottom Layer w0.3: S3.1 v1(17.5,11.1) ; v1(35.8,16.7) 40.6,16.7 v1(41.6,15.7)
NetC10_2: C10.2 C50.2 C51.2 C52.2 R18.2 U14.5 U14.17 U14.27 U14.38 | length 32.9
  Top Layer w0.3: U14.17 v1(47.4,13) ; v1(50.5,8.8) 50.5,8.638 50.643,8.495 50.643,7.357 U14.27 ; R18.2 53.5,22.4 52.3,21.2 U14.5 52.3,17 v1(53.9,15.4) ; v1(55.3,12.2) U14.38
  Bottom Layer w0.3: v1(47.4,13) 48.363,13 48.778,13.414 C50.2 50.2,13.414 ; v1(50.5,8.8) 50.412,8.888 50.412,9.674 C52.2 50.2,10.114 50.2,11.5 ; v1(53.9,15.4) 53.014,15.4 C51.2 52.914,14.414 51.914,13.414 50.2,13.414 ; v1(55.3,12.2) 55.138,12.2 54.849,11.912 54.326,11.912 C10.2 53.914,11.5 50.2,11.5 ; 50.2,11.5 50.2,13.414
NetC21_2: C21.2 R31.1 U14.29 | length 27.9
  Top Layer w0.25: R31.1 39.211,2.611 39.9,3.3 41.7,3.3 42.3,3.9 42.3,5.3 42.922,5.922 44.578,5.922 47,3.5 50.8,3.5 51.482,2.818 v1(51.482,2.682)
  Top Layer w0.3: U14.29 52.3,5.8 v1@52.55,5.55 ; v1(52.4,5.4) 52.452,5.349 52.452,4.741 52.778,4.414 C21.2
  Bottom Layer w0.25: v1(51.482,2.682) 52.4,3.6 v1(52.4,5.4)
NetC47_2: C47.2 U14.8 X1.2 | length 12.1
  Top Layer w0.3: U14.8 49.9,26.1 49.5,26.5 49.5,26.736 50.35,27.586 C47.2
NetC48_2: C48.2 U14.7 X1.1 | length 23
  Top Layer w0.3: X1.1@49.5,35.5 49.5,35.264 50.35,34.414 C48.2 53.326,34.088 53.612,34.088 54.2,33.5 54.2,26.9 53.8,26.5 51.9,26.5 51.1,25.7 51.1,21.6 50.7,21.2 U14.7
NetC49_2: C49.2 R36.1 U4.3 U4.24 | length 11
  Top Layer w0.3: R36.1 C49.2 68.186,15.586 68.857,16.257 69.582,16.257 U4.3 71.775,16.275 73.25,17.75 U4.24
NetC53_1: C53.1 R19.2 S5.1 U14.13 | length 61.5
  Top Layer w0.3: v1(6,15.2) 6.089,15.289 6.089,23.611 ; C53.1@7.386,21.3 C53.1 R19.2 6.089,23.611 ; U14.13 45.757,16.243 44.48,16.243 42.994,17.73 42.994,20.106 40.2,22.9 27.9,22.9 26.197,24.603 18.997,24.603 17.3,26.3 6.4,26.3 6.089,25.989 6.089,23.611
  Bottom Layer w0.3: v1(6,15.2) 7.45,15.2 S5.1
NetC54_1: C54.1 R86.5 U14.37 | length 5.1
  Top Layer w0.3: v1(55.41,11.102) 55.565,11.102 55.863,11.4 U14.37 59.1,11.4 59.2,11.3 R86.5
  Bottom Layer w0.3: v1(55.41,11.102) 55.41,10.005 C54.1
NetD2_A: D2.A R25.2 | length 15
  Top Layer w0.3: v1(96,33.7) 97.7,33.7 98,34 R25.2
  Bottom Layer w0.3: v1(96,33.7) D2.A
NetD3_K: D3.K R32.2 | length 9.7
  Top Layer w0.5: v1(64.4,11.3) 64.4,11.408 64.552,11.56 64.552,11.917 64.746,12.111 R32.2
  Bottom Layer w0.5: v1(64.4,11.3) 67.422,14.322 67.422,16.972 68.125,17.675 68.125,17.7 68.475,18.05 D3.K
NetDS1_2: DS1.2 R35.1 | length 5.1
  Top Layer w0.25: R35.1 79.1,32.989 v1(79.1,33.8)
  Bottom Layer w0.25: v1(79.1,33.8) 79.17,33.8 81.87,36.5 81.875,36.5 82,36.625 DS1.2
NetDS1_3: DS1.3 R33.1 | length 2.4
  Top Layer w0.25: R33.1 v1(83,33.8)
  Bottom Layer w0.25: v1(83,33.8) DS1.3
NetDS1_4: DS1.4 R34.1 | length 3.1
  Top Layer w0.25: R34.1 81.1,32.989 v1(81.1,33.8)
  Bottom Layer w0.25: v1(81.1,33.8) 81.1,34.9 81.5,35.3 81.95,35.3 DS1.4
NetJ4_1: J4.1 U14.12 | length 11.1
  Top Layer w0.3: J4.1 43.497,24.963 43.497,17.938 44.435,17 U14.12
NetJ4_2: J4.2 U14.11 | length 13.6
  Top Layer w0.3: J4.2 44,27 44,19.2 44.5,18.7 U14.11
NetL1_1: L1.1 T1.D | length 1.9
  Top Layer w0.3: L1.1 91.74,31.244 91.74,31.74 92.193,32.193 92.244,32.193 92.5,32.449 T1.D
NetL2_1: L2.1 T2.D | length 2.2
  Bottom Layer w0.3: T2.D 99,15.949 99.256,15.693 99.307,15.693 99.497,15.503 L2.1
NetL2_2: L2.2 R7.2 | length 1.6
  Bottom Layer w0.3: L2.2 R7.2
NetLCD1_2: LCD1.2 P1.2 | length 48.8
  Bottom Layer w0.25: P1.2@41,2 P1.2@41,4.54
  Bottom Layer w0.3: P1.2@41,2 42.3,2 43.7,0.6 84.9,0.6 85.7,1.4 LCD1.2
NetM1_5: M1.5 R25.1 | length 15.2
  Top Layer w0.3: R25.1 111.389,23.011 v1(113.1,21.3)
  Bottom Layer w0.3: M1.5 v1(113.1,21.3)
NetM1_9: M1.9 R10.1 | length 61.7
  Top Layer w0.3: R10.1 78.9,36.5 80.397,37.997 93.592,37.997 94.892,36.697 97.508,36.697 98.608,37.797 118.492,37.797 119.294,36.994 119.294,33.494 v1(119.2,33.4)
  Bottom Layer w0.3: M1.9 119.1,21.3 120.097,22.297 120.097,32.503 v1(119.2,33.4)
NetM1_10: M1.10 R11.1 | length 61.5
  Top Layer w0.3: R11.1 93.8,38.5 95.1,37.2 97.3,37.2 98.4,38.3 118.7,38.3 120.6,36.4 v1(120.6,33.4)
  Bottom Layer w0.3: v1(120.6,33.4) M1.10 M1.10@120.703,19.603
NetM1_11: M1.11 R41.2 | length 2.1
  Bottom Layer w0.3: R41.2 120.6,1.711 M1.11
NetP_ATmega_SPI1_1: P_ATmega_SPI1.1 R23.8 | length 2.5
  Top Layer w0.3: P_ATmega_SPI1.1 60.05,25.95 60.05,25.9 60.15,25.8 R23.8
NetP_ATmega_SPI1_5: P_ATmega_SPI1.5 R23.7 | length 7.9
  Top Layer w0.3: P_ATmega_SPI1.5 61.1,29.98 R23.7
NetP_ATmega_SPI1_7: P_ATmega_SPI1.7 R23.6 | length 10.7
  Top Layer w0.25: v1(60,32.5) 61.9,30.6 R23.6
  Bottom Layer w0.25: P_ATmega_SPI1.7 60,33.62 v1(60,32.5)
NetP_ATmega_SPI1_9: P_ATmega_SPI1.9 R23.5 | length 13.6
  Top Layer w0.25: v1(61.1,32.6) 62.775,30.925 R23.5
  Bottom Layer w0.25: P_ATmega_SPI1.9 61.1,35.06 v1(61.1,32.6)
NetR9_1: R9.1 R27.1 T2.G | length 63.3
  Top Layer w0.3: R27.1 48.108,2.503 48.108,1.892 48.497,1.503 v1(51.6,1.503) ; v1(61.3,1.5) 61.393,1.5 61.776,1.883 61.906,1.883 65.023,5 81.4,5 82.1,4.3 v1(83.3,4.3) ; v1(88.7,8.203) 89.603,8.203 90,8.6 92.8,8.6 97.5,13.3 v1(97.5,16.8)
  Bottom Layer w0.3: v1(51.6,1.503) 51.762,1.503 52.066,1.2 60.838,1.2 61.138,1.5 v1(61.3,1.5) ; v1(83.3,4.3) 83.386,4.386 83.386,4.886 84.3,5.8 85.6,5.8 88.003,8.203 v1(88.7,8.203) ; v1(97.5,16.8) 97.5,16.901 97.874,17.276 97.874,17.824 T2.G 98.05,19.939 R9.1
NetR10_2: R10.2 U14.9 | length 50.9
  Top Layer w0.3: U14.9 49.1,20.5 46.7,22.9 46.7,35.9 48.4,37.6 51.6,37.6 55.3,33.9 72.1,33.9 74.7,36.5 R10.2
NetR11_2: R11.2 U14.10 | length 52.9
  Top Layer w0.25: U14.10 48.3,20.6 46.222,22.678 46.222,36.098 48.202,38.078 51.798,38.078 53.476,36.4 59.1,36.4 61.122,34.378 71.902,34.378 74.4,36.876 74.4,37.8 75.188,38.588 ; 75.3,38.588 75.188,38.588 ; R11.2 76.023,38.588 75.188,38.588
NetR12_1: R12.1 R14.2 U14.20 | length 30.7
  Top Layer w0.25: v1(43,14) 43,12.2 44.6,10.6 U14.20 ; R14.2 R12.1 44.507,35.396 45.604,35.396 45.769,35.231 45.769,20.994 45.422,20.648 v1(45.422,20.522)
  Bottom Layer w0.25: v1(43,14) 43.547,14.547 43.547,18.688 44,19.141 44,20 44.5,20.5 45.4,20.5 v1(45.422,20.522)
NetR13_2: R13.2 R60.1 U14.19 | length 30.8
  Top Layer w0.25: v1(41.2,32.5) 43,32.5 44,31.5 44,27.676 44.478,27.198 44.478,20.025 v1(45,19.503) ; v1(41.2,35) 41.27,35.07 42.166,35.07 42.493,35.396 R60.1 R13.2 ; v1(44,13.1) 44,12 44.6,11.4 U14.19
  Bottom Layer w0.25: v1(41.2,32.5) v1(41.2,35) ; v1(44,13.1) 44,18.5 45,19.5 v1(45,19.503)
NetR15_5: R15.5 U14.33 | length 3.8
  Top Layer w0.3: U14.33 55.557,7.243 55.557,6.177 57.1,4.635 57.1,4.4 57.2,4.3 R15.5
NetR15_6: R15.6 U14.32 | length 3.7
  Top Layer w0.3: U14.32 54.757,7.243 54.757,6.266 54.804,6.219 56.3,4.723 56.3,4.4 R15.6
NetR15_7: R15.7 U14.31 | length 3.7
  Top Layer w0.3: U14.31 53.957,7.243 53.957,6.343 55.541,4.759 55.541,4.359 R15.7
NetR15_8: R15.8 U14.30 | length 3.7
  Top Layer w0.3: U14.30 53.1,6.3 54.639,4.761 54.639,4.386 R15.8
NetR16_5: R16.5 U14.43 | length 2
  Top Layer w0.3: U14.43 59.125,16.2 R16.5
NetR16_6: R16.6 U14.42 | length 2
  Top Layer w0.3: U14.42 R16.6
NetR16_7: R16.7 U14.41 | length 2
  Top Layer w0.3: U14.41 R16.7
NetR16_8: R16.8 U14.40 | length 2
  Top Layer w0.3: U14.40 59.125,13.8 R16.8
NetR17_8: R17.8 U14.44 | length 2.6
  Top Layer w0.3: U14.44 57.561,17 57.7,17.139 R17.8
NetR26_1: R26.1 R71.1 R86.4 | length 7.1
  Top Layer w0.3: R71.1 R71.1@59.706,6.889 ; R86.4 60.725,11.2 60.3,11.2 60,10.9 60,7.184 R71.1@59.706,6.889 ; R26.1 R71.1@59.706,6.889
NetR27_2: R27.2 U14.25 | length 3.4
  Top Layer w0.3: R27.2 48.1,4.489 48.1,5.2 49.057,6.157 49.057,7.257 U14.25
NetR28_2: R28.2 U14.26 | length 3
  Top Layer w0.3: U14.26 49.9,4.489 R28.2
NetR30_1: R30.1 R31.2 U3.1 U3.2 | length 6.2
  Top Layer w0.3: R30.1 28.589,4.389 28.85,4.65 U3.2 U3.1 32.15,4.65 32.411,4.389 R31.2
NetR32_1: R32.1 T3.3 | length 2.4
  Top Layer w0.3: T3.3 64,15.73 64.256,15.474 64.358,15.474 65,14.832 R32.1
NetR33_2: R33.2 T4.6 | length 13.5
  Top Layer w0.25: v1(81.128,24.372) 81.9,23.6 T4.6 ; v1(82.8,25.9) 82.8,30.911 R33.2
  Bottom Layer w0.25: v1(81.128,24.372) 82.657,25.9 v1(82.8,25.9)
NetR34_2: R34.2 T4.3 | length 15.8
  Top Layer w0.25: T4.3 80.65,17.25 81,17.6 81,23 80.3,23.7 v1(80.3,25.1) ; R34.2 81,27.548 v1(81.824,26.724)
  Bottom Layer w0.25: v1(80.3,25.1) 81.824,26.624 v1(81.824,26.724)
NetR35_2: R35.2 T5.6 | length 2.3
  Top Layer w0.3: T5.6 78.989,31.1 R35.2
NetR37_5: R37.5 U4.4 | length 13.3
  Top Layer w0.25: U4.4 71.475,15.625 74.106,12.994 74.106,9.694 75.275,8.525 R37.5
NetR37_6: R37.6 U4.5 | length 12.2
  Top Layer w0.25: U4.5 71.425,14.975 73.653,12.747 73.653,9.506 74.4,8.759 R37.6
NetR37_7: R37.7 U4.6 | length 11.2
  Top Layer w0.25: U4.6 71.375,14.325 73.2,12.5 73.2,9.318 73.6,8.918 R37.7
NetR37_8: R37.8 U4.7 | length 10.2
  Top Layer w0.25: U4.7 71.325,13.675 72.725,12.275 R37.8
NetR38_1: R38.1 U4.16 | length 9.4
  Top Layer w0.25: U4.16 76.348,12.375 77.706,11.016 77.706,9.194 80.635,6.265 80.635,5.925 80.76,5.8 R38.1
NetR38_2: R38.2 U4.15 | length 8.3
  Top Layer w0.25: U4.15 76.357,11.725 77.253,10.829 77.253,9.006 79.9,6.359 R38.2
NetR38_3: R38.3 U4.14 | length 7.4
  Top Layer w0.25: U4.14 76.366,11.075 76.8,10.641 76.8,8.818 79.1,6.518 R38.3
NetR38_4: R38.4 U4.13 | length 5.6
  Top Layer w0.25: U4.13 75.4,9.577 78.225,6.752 R38.4
NetR39_5: R39.5 U4.8 | length 10.2
  Top Layer w0.25: U4.8 71.275,13.025 72.272,12.028 72.272,7.672 70.4,5.8 R39.5
NetR39_6: R39.6 U4.9 | length 9.9
  Top Layer w0.25: R39.6 69.4,6.2 69.6,6.4 70.359,6.4 71.819,7.86 71.819,11.781 71.225,12.375 U4.9
NetR39_7: R39.7 U4.10 | length 9.3
  Top Layer w0.25: R39.7 68.6,6.5 68.953,6.853 70.171,6.853 71.365,8.047 71.365,11.235 70.875,11.725 U4.10
NetR39_8: R39.8 U4.11 | length 8.6
  Top Layer w0.25: R39.8 67.725,6.425 68.606,7.306 69.984,7.306 70.912,8.235 70.912,10.888 70.725,11.075 U4.11
NetR40_1: R40.1 U4.20 | length 2.4
  Top Layer w0.3: U4.20 76.675,14.975 76.975,15.275 R40.1
NetR40_2: R40.2 U4.19 | length 2.3
  Top Layer w0.3: U4.19 77.625,14.325 R40.2
NetR40_3: R40.3 U4.18 | length 2.3
  Top Layer w0.3: U4.18 76.925,13.675 77,13.6 R40.3
NetR40_4: R40.4 U4.17 | length 2.4
  Top Layer w0.3: U4.17 76.675,13.025 77,12.7 77.675,12.7 R40.4
NetR86_6: R86.6 U14.36 | length 2.1
  Top Layer w0.3: U14.36 58.6,10.6 58.699,10.501 58.732,10.468 59.132,10.468 R86.6
NetR86_7: R86.7 U14.35 | length 2.1
  Top Layer w0.3: U14.35 58.4,9.8 58.6,9.6 R86.7
NetR86_8: R86.8 U14.34 | length 2.1
  Top Layer w0.3: U14.34 58.4,9 58.7,8.7 59.175,8.7 R86.8
OWIRE: R16.1 R85.1 U1.2 | length 22.1
  Top Layer w0.3: R16.1 60.275,13.725 60,14 60,17.277 63.223,20.5 71.817,20.5 72.111,20.795 72.111,23.311 72.5,23.7 U1.2
Reset: C11.2 P_ATmega_JTAG1.6 R23.2 R29.2 U14.4 | length 37.3
  Top Layer w0.3: P_ATmega_JTAG1.6 40.169,12.791 41.009,12.791 43.3,10.5 v1(43.3,9.803) ; v1(47.9,9.8) 50.1,9.8 54.8,14.5 54.8,15.7 v1(54,16.5) 53.1,17.4 U14.4 53.1,20.5 55.5,22.9 R29.2 55.789,23.611 56.3,23.1 v1(56.7,23.1) ; v1(59.3,23.1) 60.4,23.1 61.032,23.732 61.032,24.132 R23.2
  Bottom Layer w0.3: v1(43.3,9.803) 47.897,9.803 v1(47.9,9.8) ; C11.2 52.914,17.278 53.241,16.952 53.524,16.952 53.976,16.5 v1(54,16.5) ; v1(56.7,23.1) v1(59.3,23.1)
RS: LCD1.4 R38.8 | length 2.8
  Top Layer w0.3: R38.8 80.85,4.2 80.95,4.1 80.95,4.025 81.928,3.047 81.928,2.172 LCD1.4
RW: LCD1.5 R38.7 | length 2.5
  Top Layer w0.3: R38.7 79.9,3.026 80.3,2.626 LCD1.5 LCD1.5@80.208,2.092
SCK: R17.5 R23.3 U14.3 | length 13.5
  Top Layer w0.3: U14.3 53.9,20.488 55.187,21.775 R17.5 57.7,23.8 58.9,25 61.6,25 61.882,24.718 61.882,24.218 R23.3
SCL: R13.1 U4.22 | length 56.5
  Top Layer w0.25: R13.1 42.754,38.389 43.074,38.709 43.074,38.963 43.464,39.353 58.973,39.353 62.326,36 65.9,36 66.117,35.783 66.117,35.283 v1(66.2,35.2) ; v1(66.2,31.7) 66.2,27.4 66.447,27.153 75.988,27.153 77.053,26.088 77.053,17.002 76.327,16.275 U4.22
  Bottom Layer w0.25: v1(66.2,31.7) v1(66.2,35.2)
SD.CD: J1.10 R5.2 R16.2 | length 39.5
  Top Layer w0.3: R16.2 61.8,14.6 62.8,13.6 62.8,10 64.664,8.136 67.7,8.136 v1(68,7.836) ; v1(80.2,8) 80.276,8 80.676,8.4 86,8.4 87.11,7.29 87.11,6.779 R5.2 87.389,6.246 87.684,5.951 87.749,5.951 89.25,4.45 J1.10
  Bottom Layer w0.3: v1(68,7.836) 68,7.9 68.5,7.4 ; 70.4,7.4 68.5,7.4 ; v1(80.2,8) 79.212,8 78.612,7.4 68.5,7.4
SD.CS: J1.1 R17.1 R24.2 | length 44.7
  Top Layer w0.3: R17.1 61.237,19.225 63.212,21.2 68.397,21.2 v1(68.5,21.303) ; v1(85.31,19.4) 85.31,23.098 86.308,24.097 87.703,24.097 88.327,23.473 R24.2@88.327,22.562 ; R24.2@88.316,22.573 R24.2@88.327,22.562 ; R24.2 R24.2@88.327,22.562 ; R24.2@88.448,22.375 J1.1
  Bottom Layer w0.3: v1(68.5,21.303) 68.397,21.2 67.7,21.2 66.9,22 66.9,22.6 67.833,23.533 71.171,23.533 71.937,22.768 71.937,21.987 75.11,18.813 83.913,18.813 84.5,19.4 v1(85.31,19.4)
SD.MISO: J1.7 R4.2 R17.3 | length 43.3
  Top Layer w0.3: R17.3 61.488,20.9 62.795,22.206 66.567,22.206 67.461,23.1 68.4,23.1 69.488,22.012 69.488,21.418 v1(69.603,21.303) ; v1(85,16.694) 85,13.8 87.389,11.411 R4.2 87.389,8.311 88.9,6.8 89.6,6.8 90.25,7.45 J1.7
  Bottom Layer w0.3: v1(69.603,21.303) 69.708,21.408 70.381,21.408 74.485,17.304 78.033,17.304 83.696,17.304 84.306,16.694 v1(85,16.694)
SD.MOSI: J1.2 R2.2 R17.2 | length 49.2
  Top Layer w0.3: R17.2 61.4,20.1 63.003,21.703 67.141,21.703 67.72,22.282 v1(67.882,22.282) ; v1(85,18.3) 84.506,18.794 84.506,23.006 86.1,24.6 89.2,24.6 89.8,24 91.1,24 91.9,23.2 91.9,20.8 J1.2@90.975,19.875 ; R2.2 88.514,19.875 J1.2 J1.2@90.975,19.875 ; J1.2@91.004,19.875 J1.2@90.975,19.875
  Bottom Layer w0.3: v1(67.882,22.282) 69.087,22.282 69.834,23.03 70.963,23.03 71.433,22.559 71.433,21.778 74.902,18.31 84.566,18.31 84.576,18.3 v1(85,18.3)
SD.PWROFF: R1.1 R16.4 T1.G | length 53.1
  Top Layer w0.25: R16.4 60.8,17.4 63.096,19.697 v1(63.8,19.697)
  Top Layer w0.3: v1@63.798,19.695 v1(63.8,19.697) ; v1(63.8,23.6) 63.8,24.862 63.5,25.162 63.5,32.8 64.097,33.397 72.308,33.397 74.312,35.4 78.6,35.4 80.694,37.494 93.206,37.494 93.389,37.311 R1.1 93.45,35.939 T1.G
  Bottom Layer w0.3: v1(63.8,19.697) v1(63.8,23.6)
SD.SCK: J1.5 R3.2 R17.4 | length 39.6
  Top Layer w0.3: R17.4 59.725,21.775 60.097,21.403 61.28,21.403 62.586,22.71 66.359,22.71 67.253,23.603 69.197,23.603 70.574,22.226 v1(70.63,22.226) ; v1(86,17.5) 86,13.7 86.589,13.111 R3.2 89.66,13.111 90.396,12.375 J1.5
  Bottom Layer w0.3: v1(70.63,22.226) 70.745,22.112 70.745,21.755 70.93,21.57 74.693,17.807 84.293,17.807 84.3,17.8 84.364,17.8 84.667,17.497 85.997,17.497 v1(86,17.5)
SD.WP: J1.11 R6.2 R16.3 | length 40.5
  Top Layer w0.3: R16.3 61.712,15.4 63.303,13.808 63.303,10.208 64.873,8.639 68.664,8.639 v1(69.1,8.203) ; v1(81.2,7.303) 81.297,7.4 82.2,7.4 84.5,5.1 84.5,3.576 84.676,3.4 86.543,3.4 87.389,4.246 R6.2 88.4,4.5 89.65,3.25 J1.11
  Bottom Layer w0.3: v1(69.1,8.203) 69.1,8.1 69.297,7.903 78.403,7.903 79.4,8.9 80.6,8.9 81.2,8.3 v1(81.2,7.303)
SDA: R14.1 U4.23 | length 52.1
  Top Layer w0.25: R14.1 44.754,38.389 45.265,38.9 58.785,38.9 62.528,35.156 v1(65,35.156) ; v1(65,31.7) 65,27.7 66,26.7 75.8,26.7 76.6,25.9 76.6,17.2 76.325,16.925 U4.23
  Bottom Layer w0.25: v1(65,31.7) v1(65,35.156)
TCK: P_ATmega_JTAG1.1 U14.21 | length 13.3
  Top Layer w0.3: P_ATmega_JTAG1.1 38.8,16.7 38.8,14.7 39.3,14.2 41,14.2 41.9,13.3 41.9,12.624 44.666,9.857 45.743,9.857 U14.21
TDI: P_ATmega_JTAG1.9 U14.24 | length 13
  Top Layer w0.3: P_ATmega_JTAG1.9 38.94,6.4 46.2,6.4 46.9,5.7 47.888,5.7 48.3,6.112 U14.24
TDO: P_ATmega_JTAG1.3 U14.23 | length 19.2
  Top Layer w0.3: P_ATmega_JTAG1.3 35.8,13.76 35.8,9.7 36.4,9.1 41.1,9.1 42.9,7.3 U14.23
TMS: P_ATmega_JTAG1.5 U14.22 | length 10.6
  Top Layer w0.3: P_ATmega_JTAG1.5 38.82,11.6 40.9,11.6 41.7,10.8 41.7,9.7 42.4,9 U14.22
pads on no net: J1.6 J1.8 J1.9 J1.MH M1.2 M1.6 M1.7 M1.H P_ATmega_JTAG1.7 P_ATmega_JTAG1.8 P_ATmega_SPI1.3 R15.3 R15.4 R28.1 R38.5 R40.7 R86.1 R86.2 R86.3 S1.3 S1.4 S2.3 S2.4 S3.3 S3.4 S5.3 S5.4 U2.3@30.976,25.436 U2.4@30.976,27.976 U2.5 U2.6 U4.1

## Polygon pours and split planes (outlines as drawn)
GND on Top Layer "gnd" (solid, remove dead copper, pour order 0): 0.5,0 123.5,0 123.5,40 0.5,40
GND on Bottom Layer "gnd" (solid, remove dead copper, pour order 1): 0.5,0 123.5,0 123.5,40 0.5,40

## Keep-outs
Keep-Out Layer:
  the board outline again, w0.2

## Other copper
Top Layer:
  pour cut-out: 26.159,4.159 26.542,4.159 26.6,4.1 26.5,4 26,4
  pour cut-out: 11.841,1.339 11.841,0.459 12,0.3 12.1,0.4 12.1,1.6
  pour cut-out: 94.5,39.5 94.5,38.5 94,38.5 94,39.5
  pour cut-out: 94,31.5 96,31.5 96,32 94,32
  pour cut-out: 92.398,29.794 92.794,29.794 93,30 92,30
  pour cut-out: 47.035,17 47.5,17.465 47.5,17.7 46.8,17
  pour cut-out: 98.5,36.5 98.5,34.5 98,34.5 98,36
  pour cut-out: 48.5,30.75 48.5,28.25 48.25,28.25 48.25,30.75
  pour cut-out: 39.5,8.75 41,8.75 41.25,8.5 41.25,7.25 40.75,6.75 39.5,6.75 39,7.25 39,8.25
  pour cut-out: 71.004,25.203 71.004,24.797 71.051,24.75 71.25,24.75 71.25,25.25
  pour cut-out: 65.794,16.57 64.82,16.57 64.75,16.5 65,16.25 66,16.25
  pour cut-out: 56.5,5.75 58.75,5.75 58.75,5.25 57,5.25
  pour cut-out: 52.5,2 53.5,2 53.5,1.75 52.5,1.75
  pour cut-out: 32.294,1.659 32.294,1.206 32.5,1 32.5,2
  pour cut-out: 19.5,22 19.5,20.75 19.25,20.5 19.25,21.75
  pour cut-out: 92.65,22 92.65,23 93.575,23.925 93.303,24.197 92.453,24.197 92.453,22.003 92.45,22
Bottom Layer:
  pour cut-out: 121.5,32.3 123.2,34 123.2,26.6 121.5,28.3 121.5,28.7
  pour cut-out: 88.9,10.2 89.7,9.4 89.7,9.1 89.6,9.1 88.7,10

## Silkscreen, mask and mechanical layers (free items; w line width, h text height)
Top Overlay:
  text "'.PRJName'-'.PCBVersion'" at 3.6,11.3 h1.6

## Text inside footprints (layer, text, board x,y; h text height)
C6: Bottom Overlay "(-)" at 101,33.5 h1.6 r180; Bottom Overlay "(+)" at 121.5,35.25 h1.6 r180
P_ATmega_JTAG1: Top Overlay "1" at 36.992,20.032 h1.27 r270; Top Overlay "2" at 39.532,20.54 h1.27 r270
P_ATmega_SPI1: Top Overlay "1" at 59.008,25.468 h1.27 r90